# Altium PCB 5V2A Flyback converter pcb.PcbDoc
Units mm, origin at the board's own origin, x right, y up, seen from the top; angles counter-clockwise.
Board outline 103 x 38.2 mm, 2 copper layers (Top Layer, Bottom Layer), stack 1.571 mm thick; 36 components, 22 nets, 102 pads, 22 vias.
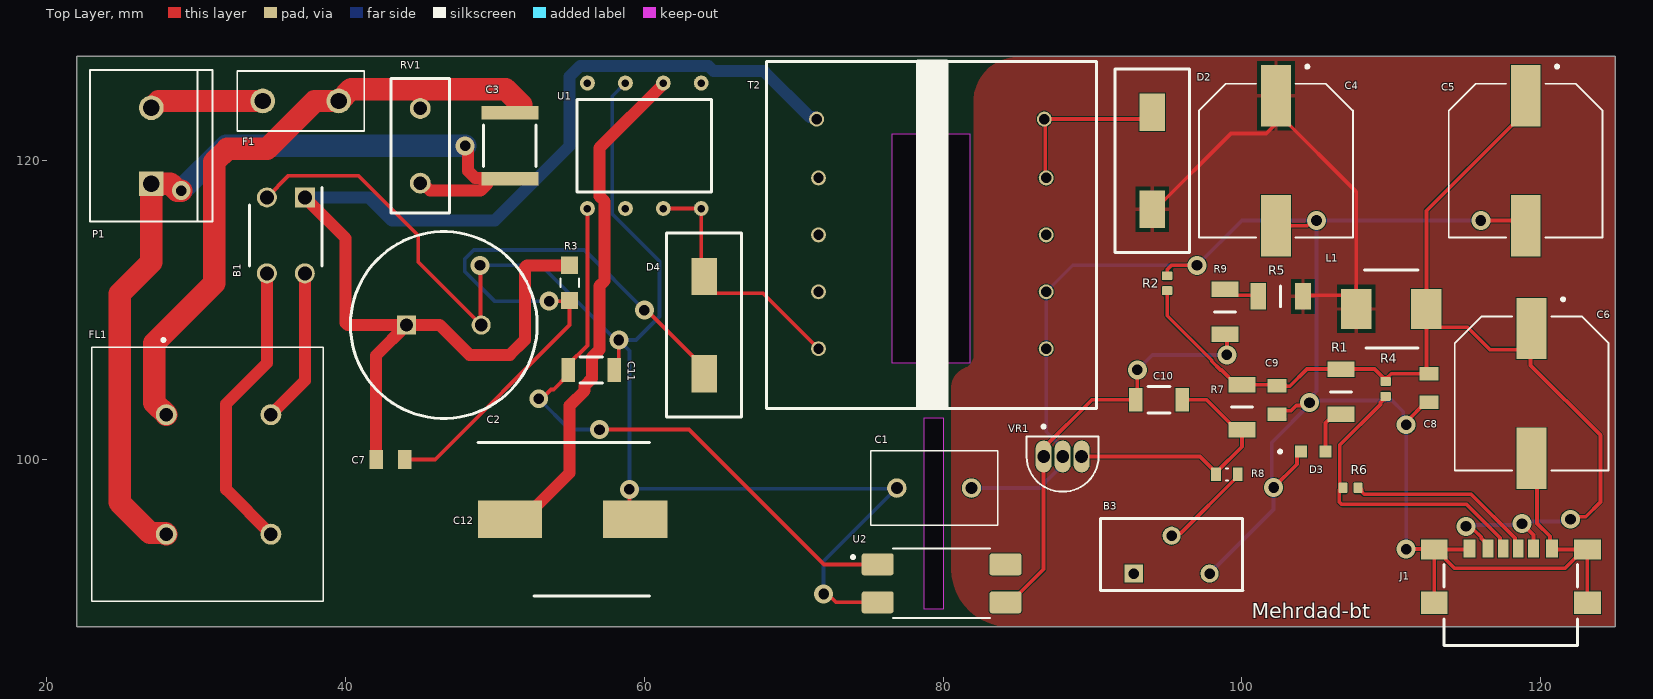
[diagram p0: Top Layer view]
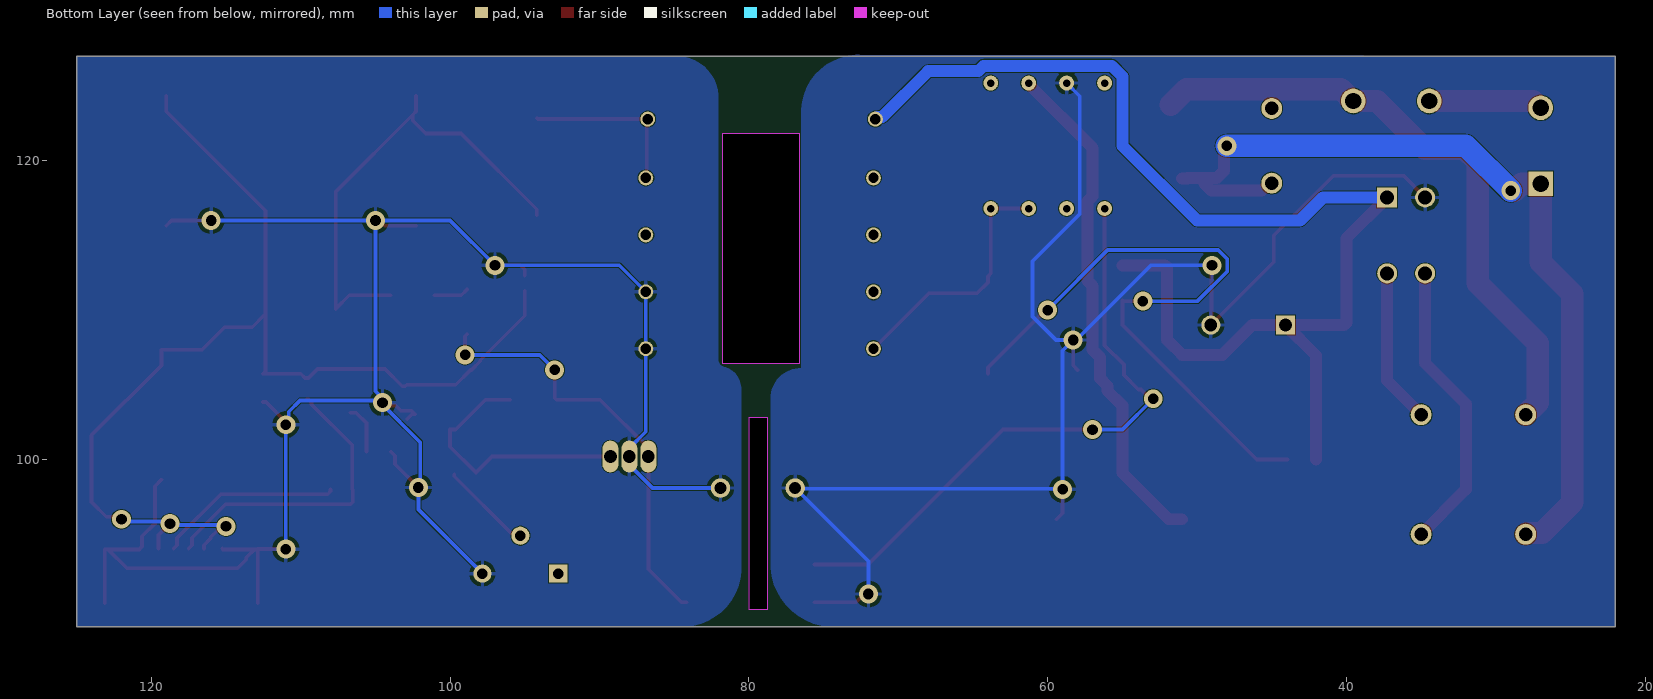
[diagram p1: Bottom Layer view, seen from below]
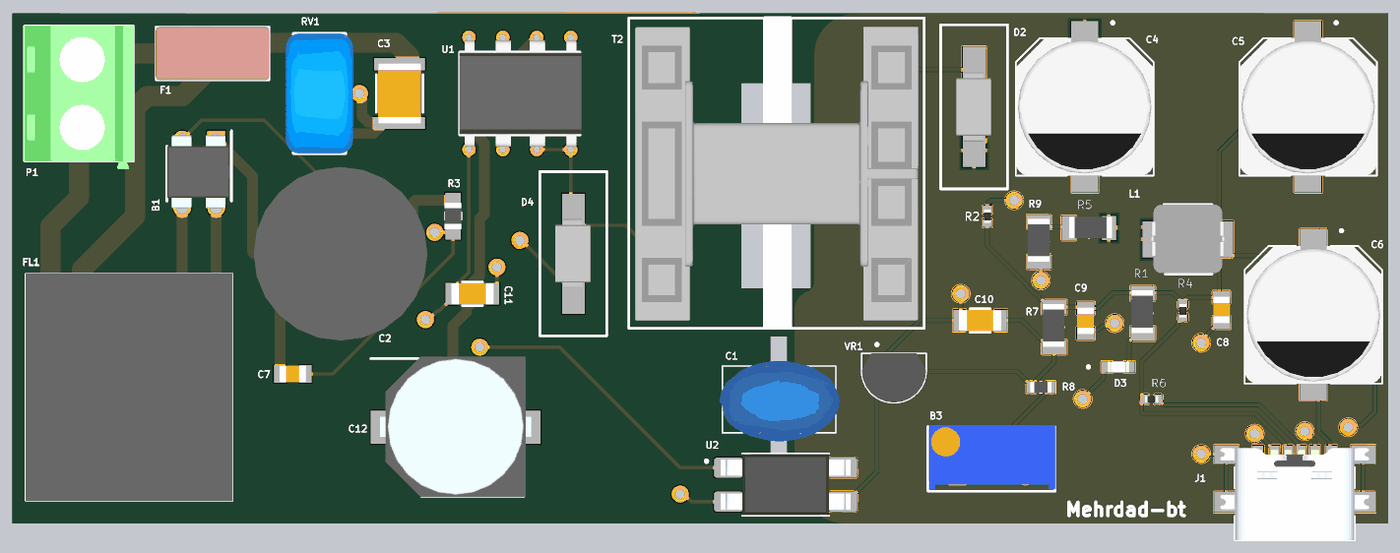
[diagram p2: 3D render of the assembled board from above, using the file's embedded part models]

## Layer stack, top to bottom
Top Solder: solder mask 0.0102, Solder Resist, Dk 3.5
Top Layer: signal copper 0.0356
Dielectric 1: dielectric 1.5, FR-4, Dk 4.8
Bottom Layer: signal copper 0.0356
Bottom Solder: solder mask 0.0102, Solder Resist, Dk 3.5

## Board outline
22,88.8 22,127 125,127 125,88.8
cut-out: 78.74,89.98 78.74,102.806 80.01,102.806 80.01,89.98
cut-out: 76.581,106.426 76.581,121.793 81.788,121.793 81.788,106.426

## Design rules (kind name [scope] priority, off if disabled: settings)
Clearance [All] p1: gap=0.05 ignorepadtopadclearanceinfootprint=TRUE
Height [All] p1: minheight=0 maxheight=30 prefheight=12.7
PolygonConnect [All] p1: connectstyle=Relief reliefconductorwidth=0.254 reliefentries=4 polygonreliefangle="90 Angle" airgapwidth=0.254
RoutingVias [All] p1: holewidth=0.711 width=1.27 viastyle="Through Hole" minholewidth=0.711 minwidth=1.27 maxholewidth=0.711 maxwidth=1.27
SolderMaskExpansion [All] p1: expansion=0.102 istentingtop=FALSE
Width [All] p1: maxlimit=0.254 minlimit=0.254 preferedwidth=0.254
29 further rules are at their usual default settings.

## Components (designator, comment, footprint, x,y, rotation, side; value= is the part's Value field where it differs from the comment)
B1 "MB6M-E3_45" DIP508W74P254L469H270Q4N 36,115 r270 top
B3 "Potentiometer" 3296Y1504LF 92.76,92.36 r90 top
C1 "2.2nf 1kv" CK45B3AD222KYNNA 76.9,98.088 r0 top
C2 "22uf 400v" CAPPRD500W65D1250H2700 44.079,109 r0 top
C3 "100nF 630v" WCAP-CSMH_1812_L4.5W3.2H2 51,121 r90 top
C4 "1000uf 10v" CAP_EEEFN1A102P 102.279,120 r270 top
C5 "1000uf 10v" CAP_EEEFN1A102P 119,120 r270 top
C6 "1000uf 10v" CAP_EEEFN1A102P 119.4,104.425 r270 top
C7 "10nF 200v" WCAP-CSMH_0805_L2W1.25H1.25 43,100 r180 top
C8 "1uF" WCAP-CSST_0805_L2W1.25H1.25 112.527,104.794 r90 top
C9 "100nF" WCAP-CSST_0805_L2W1.25H1.25 102.35,103.975 r90 top
C10 "100nF" WCAP-CSST_1206_L3.2W1.6H1.25 94.45,104 r0 top
C11 "10nF" WCAP-CSST_1206_L3.2W1.6H1.25 56.45,106 r180 top
C12 "100uf 16v" CAPAE1030X1100N 55.2,96 r0 top
D2 "RS1M-13-F" B360A-13-F 94,120 r270 top value=15pF
D3 "KP-1608SURCK" LED_KP-1608SURCK 104.783,100.524 r0 top
D4 "RS1M-13-F" B360A-13-F 64,109 r270 top value=15pF
F1 "39211000440" "LITTELFUSE 39211000440" 37,124 r0 top
FL1 "7355-H-RC_1" 7355HRC 28,103 r0 top
J1 "USB4135-GF-A_REVA" GCT_USB4135-GF-A_REVA 118,90.4 r0 top
L1 "10uh" INDPM5552X200N 110,110.079 r0 top
P1 "282837-2" TE_282837-2 27,121 r90 top
R1 "1k" 4.7k 106.625,104.532 r90 top
R2 "470R" RES_0402 95,111.8 r270 top
R3 "68k" RES_ERA6ARW683V 55,111.825 r90 top
R4 "10k" RES_0402 109.625,104.725 r270 top
R5 "1k" 4.7k 102.595,110.925 r0 top
R6 "10k" RES_0402 107.275,98.1 r180 top
R7 "4.7k" 4.7k 100,103.5 r90 top
R8 "4.3k" RES_ERJU03F4301V 99,99 r180 top
R9 "4.7k" 4.7k 98.866,109.888 r90 top
RV1 "470v 1200A" MOV-07DXXXK(3.9T) 45,121 r90 top
T2 "B66206B1110T001" "PCBCOMPONENT_1 - DUPLICATE" 79.216,115.1 r0 top
U1 "DK1203" "DK1203 - DUPLICATE" 60,121 r270 top
U2 "PC817X2NIP1B" SOIC254P960X420-4N 79.9,91.708 r0 top
VR1 "TL431CLP" VREG_TL431CLP 88,100.2 r180 top

## Footprints (in the part's own frame and the unit in brackets; to place one, negate y for a bottom-side part, rotate by r counter-clockwise, add the part's x,y. Pads: shape width x height; smd on the part's side, far side on the other; paste and mask are expansions set on the pad)
4.7k [mm]
  rect 1.05x1.8 smd: 1(-1.5,0) 2(1.5,0)
  silkscreen extent 0,-0.7 0,0.7, body extent -1.47,-0.76 1.73,0.84, height 0.52
3296Y1504LF [mm]
  rect 1.217x1.217 hole 0.71: 1(0,0)
  round 1.217 hole 0.71: 2(2.54,-2.54) 3(0,-5.08)
  silkscreen extent -1.14,-7.3 3.69,2.22, body extent -1.02,-7.37 3.82,2.16, height 17.97
7355HRC [mm]
  round 1.4 hole 0.9: 1(0,0) 2(7,0) 3(7,-8) 4(0,-8)
  silkscreen extent -5,-12.5 10.5,5.1, body extent -5,-12.5 10.5,4.5, height 12.1
B360A-13-F [mm]
  rect 2.5x1.7 smd: 1(-3.25,0) 2(3.25,0)
  silkscreen extent -6.15,-2.5 6.15,2.5, body extent -2.6,-1.34 2.6,1.27, height 2.19
CAP_EEEFN1A102P [mm]
  rect 4.1x2 smd: 1(-4.35,0) 2(4.35,0)
  silkscreen extent -6.4,-5.15 5.15,5.15, body extent -5.85,-5.15 5.85,5.15, height 9.3
CAPAE1030X1100N [mm]
  rect 4.3x2.5 smd: 1(-4.2,0) 2(4.2,0)
  silkscreen extent -6.35,-5.15 5.15,5.15, body extent -5.65,-5.21 5.65,5.29, height 11
CAPPRD500W65D1250H2700 [mm]
  rect 1.275x1.275 / inner round 1.275 / far side rect 1.275x1.275 hole 0.85: 1(0,0)
  round 1.275 hole 0.85: 2(5,0)
  silkscreen extent -3.75,-6.25 8.75,6.25, body extent -3.99,-6.5 9,6.5, height 27
CK45B3AD222KYNNA [mm]
  round 1.3 hole 0.8: 1(0,0) 2(5,0)
  silkscreen extent -1.75,-2.5 6.75,2.5, body extent -1.96,-3.13 7.04,2.87, height 4.49
DIP508W74P254L469H270Q4N [mm]
  rect 1.34x1.34 / inner round 1.34 / far side rect 1.34x1.34 hole 0.94: 1(-2.54,1.27)
  round 1.34 hole 0.94: 2(-2.54,-1.27) 3(2.54,-1.27) 4(2.54,1.27)
  silkscreen extent -3.21,-2.41 2.05,2.41, body extent -2.85,-2.4 2.6,2.29, height 2.7
"DK1203 - DUPLICATE" [mm]
  round 1 hole 0.5: 1(-4.2,3.81) 2(-4.2,1.27) 3(-4.2,-1.27) 4(-4.2,-3.81) 5(4.2,-3.81) 6(4.2,-1.27) 7(4.2,1.27) 8(4.2,3.81)
  silkscreen extent -3.1,-4.5 3.1,4.5, body extent -3.97,-4.53 3.97,4.62, height 7.24
GCT_USB4135-GF-A_REVA [mm]
  rect 0.7x1.2 smd: A5(-0.5,3.635) B5(0.5,3.635)
  rect 0.76x1.2 smd: A9(1.52,3.635) B9(-1.52,3.635)
  rect 0.8x1.2 smd: A12(2.75,3.635) B12(-2.75,3.635)
  rect 1.8x1.35 smd: S1(-5.125,3.58) S4(5.125,3.58)
  rect 1.8x1.5 smd: S2(-5.125,0) S3(5.125,0)
  silkscreen extent -4.47,-2.85 4.47,2.59, body extent -5.57,-2.85 5.57,4.05, height 3.25
INDPM5552X200N [mm]
  rect 2.05x2.7 smd: 1(-2.35,0) 2(2.35,0)
  silkscreen extent -1.8,-2.6 1.8,2.6, body extent -2.73,-2.54 2.73,2.61, height 1.93
LED_KP-1608SURCK [mm]
  rect 0.8x0.8 smd: 1(0.825,0) 2(-0.825,0)
  silkscreen extent -2.32,-0.1 -2.12,0.1, body extent -0.8,-0.4 0.8,0.4, height 1.1
"LITTELFUSE 39211000440" [mm]
  round 1.65 hole 1.1: 1(-2.54,0) 2(2.54,0)
  silkscreen extent -4.25,-2 4.25,2, body extent -4.25,-2 4.25,2, height 8
MOV-07DXXXK(3.9T) [mm]
  round 1.4 hole 0.9: 1(-2.5,0) 2(2.5,0)
  silkscreen extent -4.5,-1.95 4.5,1.95, body extent -4.5,-2.5 4.5,2.5, height 4.5
"PCBCOMPONENT_1 - DUPLICATE" [mm]
  round 1 hole 0.7 paste-2539.97 mask+0: 1(-7.683,7.683) 2(-7.556,3.746) 3(-7.556,-0.064) 4(-7.556,-3.873) 5(-7.556,-7.683) 6(7.556,7.683) 7(7.683,3.746) 8(7.683,-0.064) 9(7.683,-3.873) 10(7.683,-7.683)
  silkscreen extent -11.05,-11.68 11.05,11.56, body extent -10.6,-11.11 10.6,10.89, height 19.81
RES_0402 [mm]
  rrect25% 0.6x0.7 smd: 1(-0.5,0) 2(0.5,0)
  body extent -0.5,-0.25 0.5,0.25, height 0.3
RES_ERA6ARW683V [mm]
  rect 1.15x1.15 smd: 1(-1.175,0) 2(1.175,0)
  silkscreen extent -0.28,-0.63 0.28,0.63, body extent -1,-0.63 1,0.63, height 0.6
RES_ERJU03F4301V [mm]
  rect 0.65x0.9 smd: 1(-0.725,0) 2(0.725,0)
  silkscreen extent -0.08,-0.4 0.08,0.4, body extent -0.8,-0.4 0.8,0.4, height 0.45
SOIC254P960X420-4N [mm]
  rrect25% 2.15x1.48 smd: 1(-4.28,1.27) 2(-4.28,-1.27) 3(4.28,-1.27) 4(4.28,1.27)
  silkscreen extent -6.03,-2.33 3.25,2.33, body extent -4.87,-2.29 4.87,2.29, height 4
TE_282837-2 [mm]
  rect 1.65x1.65 / inner round 1.65 / far side rect 1.65x1.65 hole 1.1: 1(-2.54,0)
  round 1.65 hole 1.1: 2(2.54,0)
  silkscreen extent -5.08,-4.1 5.08,4.1, body extent -5.68,-4.1 5.08,4.1, height 10
VREG_TL431CLP [mm]
  oval 1.07x2.14 hole 0.85: 1(1.27,0) 2(0,0) 3(-1.27,0)
  silkscreen extent -2.41,-2.1 2.41,2.35, body extent -2.41,-1.33 2.41,2.35, height 5.34
WCAP-CSMH_0805_L2W1.25H1.25 [mm] "Ceramic Capacitors, body 2x1.25mm"
  rect 0.9x1.3 smd: 1(-0.95,0) 2(0.95,0)
  body extent -1,-0.63 1,0.63, height 1.25
WCAP-CSMH_1812_L4.5W3.2H2 [mm] "Ceramic Capacitors, body 4.5x3.2mm"
  rect 0.9x3.8 smd: 1(-2.2,0) 2(2.2,0)
  silkscreen extent -1.4,-1.75 1.4,1.75, body extent -2.25,-1.6 2.25,1.6, height 2
WCAP-CSST_0805_L2W1.25H1.25 [mm] "Soft Termination MLCC, body 2.00x1.25mm"
  rect 0.9x1.3 smd: 1(-0.95,0) 2(0.95,0)
  body extent -1,-0.63 1,0.63, height 1.25
WCAP-CSST_1206_L3.2W1.6H1.25 [mm] "Soft Termination MLCC, body 3.20x1.60mm"
  rect 0.9x1.6 smd: 1(-1.55,0) 2(1.55,0)
  silkscreen extent -0.75,-0.87 0.75,0.87, body extent -1.6,-0.8 1.6,0.8, height 1.25

## Part data
B1: "Diode Rectifier Bridge Single 600V 0.8A Vishay MB6M-E3/45, Bridge Rectifier, 0.8A 600V, 4-Pin MBM", Arrow Part Number=MB6M-E3/45, Manufacturer_Name=Vishay, Mouser Part Number=625-MB6M-E3, Arrow Price/Stock=https://www.arrow.com/en/products/mb6m-e345/vishay?region=nac, Datasheet Link=http://www.vishay.com/docs/88660/mb2m.pdf, Geometry.Height=2.7mm, Manufacturer_Part_Number=MB6M-E3/45, Mouser Price/Stock=https://www.mouser.co.uk/ProductDetail/Vishay-General-Semiconductor/MB6M-E3-45?qs=NyKJzQ80QAzaNJrfLfHWPg%3D%3D
B3: "Trimmer Resistors - Through Hole 3/8\" 500Kohms Sealed Vertical Adjust", Arrow Part Number=3296Y-1-504LF, Manufacturer_Name=Bourns, Mouser Part Number=652-3296Y-1-504LF, Arrow Price/Stock=https://www.arrow.com/en/products/3296y-1-504lf/bourns?region=nac, Datasheet Link=https://componentsearchengine.com/Datasheets/2/3296Y-1-504LF.pdf, Geometry.Height=10.28mm, Manufacturer_Part_Number=3296Y-1-504LF, Mouser Price/Stock=https://www.mouser.co.uk/ProductDetail/Bourns/3296Y-1-504LF?qs=YcQ0SKcgwSr8aRG8Of3gNA%3D%3D
C1: "Disc Type Capacitors with Lead (High Voltage Ceramic Capacitors), Capacitance=2.2nF, DxT: 8.5x5mm ,F: 5mm", Arrow Part Number=CK45-B3AD222KYNNA, Manufacturer_Name=TDK, Mouser Part Number=810-CK45-B3AD222NNA, Arrow Price/Stock=https://www.arrow.com/en/products/ck45-b3ad222kynna/tdk?utm_currency=USD&region=nac, Datasheet Link=https://product.tdk.com/system/files/dam/doc/product/capacitor/ceramic/lead-disc/catalog/leaddisc_commercial_ck45_en.pdf, Geometry.Height=12.5mm, Manufacturer_Part_Number=CK45-B3AD222KYNNA, Mouser Price/Stock=https://www.mouser.co.uk/ProductDetail/TDK/CK45-B3AD222KYNNA?qs=2FIyTMJ0hNk3eTUvPTIP4A%3D%3D
C2: library part 22uf, "Aluminium Electrolytic Capacitors - Radial Leaded Al Lytic Cap Radial NHG Series 105C", Arrow Part Number=ECA-2GHG220, Manufacturer_Name=Panasonic, Mouser Part Number=667-ECA-2GHG220, Arrow Price/Stock=https://www.arrow.com/en/products/eca-2ghg220/panasonic, Datasheet Link=http://industrial.panasonic.com/cdbs/www-data/pdf/RDF0000/ABA0000C1215.pdf, Geometry.Height=27mm, Manufacturer_Part_Number=ECA-2GHG220, Mouser Price/Stock=https://www.mouser.co.uk/ProductDetail/Panasonic/ECA-2GHG220?qs=ScpEy4ykWJx1iqxOLURymA%3D%3D
C3: library part 885342211006, "WCAP-CSMH Multilayer Ceramic Chip Capacitor, Mid and High Voltage, size 1812, X7R Class II, 100nF, 630VDC", Capacitance=100nF, Capacitance Tolerance=10%, Case/Size Code=1812, Insulation Resistance=1GΩ, Manufacturer="Wurth Elektronik", Operating Temperature Max=125°C, Operating Temperature Min=-55°C, Rated Voltage (DC)=630V, Category="Multilayer Ceramic Chip Capacitors", Ceramic Type="X7R Class II", ComponentLink1Description="Website Link", ComponentLink1URL=https://www.we-online.com/redexpert/article/885342211006?ad, ComponentLink2Description="Datasheet Link", ComponentLink2URL=https://www.we-online.com/redexpert/spec/885342211006?ad, Dissipation Factor=2.5%, Height=2mm, Length=4.5mm, Manufacturer Part Number=885342211006, Match Code=WCAP-CSMH, Mount="Surface Mount", Packaging="Tape and Reel", Technical Reference=X7R1812104K630DFCT10000, Width=3.2mm
C4 C5 C6: library part EEEFN1A102P, "CAP ALUM 1000UF 20% 10V SMD", Package="RADIAL-2 Panasonic", Availability="In Stock", Check_prices=https://www.snapeda.com/parts/EEE-FN1A102P/Panasonic/view-part/6178528/?ref=eda, MF="Panasonic Electronic Components", MP=EEE-FN1A102P, Price=None, Purchase-URL=https://pricing.snapeda.com/search/part/EEE-FN1A102P/?ref=eda, SnapEDA_Link=https://www.snapeda.com/parts/EEE-FN1A102P/Panasonic/view-part/6178528/?ref=snap
C7: library part 885342207005, "WCAP-CSMH Multilayer Ceramic Chip Capacitor, Mid and High Voltage, size 0805, X7R Class II, 10nF, 200VDC", Capacitance=10nF, Capacitance Tolerance=10%, Case/Size Code=0805, Insulation Resistance=10GΩ, Manufacturer="Wurth Elektronik", Operating Temperature Max=125°C, Operating Temperature Min=-55°C, Rated Voltage (DC)=200V, Category="Multilayer Ceramic Chip Capacitors", Ceramic Type="X7R Class II", ComponentLink1Description="Website Link", ComponentLink1URL=https://www.we-online.com/redexpert/article/885342207005?ad, ComponentLink2Description="Datasheet Link", ComponentLink2URL=https://www.we-online.com/redexpert/spec/885342207005?ad, Dissipation Factor=2.5%, Height=1.25mm, Length=2mm, Manufacturer Part Number=885342207005, Match Code=WCAP-CSMH, Mount="Surface Mount", Packaging="Tape and Reel", Technical Reference=X7R0805103K200DFCT10000, Width=1.25mm
C8: library part 885382207001, "WCAP-CSST Multilayer Ceramic Chip Capacitor, Soft Termination, SMT, size 0805, X7R Class II, 1uF, 16V", Capacitance Tolerance=+/-10%, Case/Size Code=0805, Insulation Resistance=0.5GOhm, Manufacturer="Wurth Elektronik", Operating Temperature Max=125°C, Operating Temperature Min=-55°C, Rated Voltage (DC)=16V, Capacitance=1uF, Category="Multilayer Ceramic Chip Capacitors", Ceramic Type="X7R Class II", ComponentLink1Description="Website Link", ComponentLink1URL=https://www.we-online.com/redexpert/article/885382207001?ad, ComponentLink2Description="Datasheet Link", ComponentLink2URL=https://www.we-online.com/redexpert/spec/885382207001?ad, Dissipation Factor=5%, Height=1.25mm, Length=2mm, Manufacturer Part Number=885382207001, Match Code=WCAP-CSST, Mount="Surface Mount", Packaging="Tape and Reel", Technical Reference=X7R0805105K016DFCT1S000, Width=1.25mm
C9: library part 885382207007, "WCAP-CSST Multilayer Ceramic Chip Capacitor, Soft Termination, SMT, size 0805, X7R Class II, 100nF, 50V", Capacitance Tolerance=+/-10%, Case/Size Code=0805, Insulation Resistance=5GOhm, Manufacturer="Wurth Elektronik", Operating Temperature Max=125°C, Operating Temperature Min=-55°C, Rated Voltage (DC)=50V, Capacitance=100nF, Category="Multilayer Ceramic Chip Capacitors", Ceramic Type="X7R Class II", ComponentLink1Description="Website Link", ComponentLink1URL=https://www.we-online.com/redexpert/article/885382207007?ad, ComponentLink2Description="Datasheet Link", ComponentLink2URL=https://www.we-online.com/redexpert/spec/885382207007?ad, Dissipation Factor=2.5%, Height=1.25mm, Length=2mm, Manufacturer Part Number=885382207007, Match Code=WCAP-CSST, Mount="Surface Mount", Packaging="Tape and Reel", Technical Reference=X7R0805104K050DFCT1S000, Width=1.25mm
C10: library part 885382208006, "WCAP-CSST Multilayer Ceramic Chip Capacitor, Soft Termination, SMT, size 1206, X7R Class II, 100nF, 100V", Capacitance Tolerance=+/-10%, Case/Size Code=1206, Insulation Resistance=1GOhm, Manufacturer="Wurth Elektronik", Operating Temperature Max=125°C, Operating Temperature Min=-55°C, Rated Voltage (DC)=100V, Capacitance=100nF, Category="Multilayer Ceramic Chip Capacitors", Ceramic Type="X7R Class II", ComponentLink1Description="Website Link", ComponentLink1URL=https://www.we-online.com/redexpert/article/885382208006?ad, ComponentLink2Description="Datasheet Link", ComponentLink2URL=https://www.we-online.com/redexpert/spec/885382208006?ad, Dissipation Factor=2.5%, Height=1.25mm, Length=3.2mm, Manufacturer Part Number=885382208006, Match Code=WCAP-CSST, Mount="Surface Mount", Packaging="Tape and Reel", Technical Reference=X7R1206104K100DFCT1S000, Width=1.6mm
C11: library part 885382208002, "WCAP-CSST Multilayer Ceramic Chip Capacitor, Soft Termination, SMT, size 1206, X7R Class II, 10nF, 50V", Capacitance Tolerance=+/-10%, Case/Size Code=1206, Insulation Resistance=10GOhm, Manufacturer="Wurth Elektronik", Operating Temperature Max=125°C, Operating Temperature Min=-55°C, Rated Voltage (DC)=50V, Capacitance=10nF, Category="Multilayer Ceramic Chip Capacitors", Ceramic Type="X7R Class II", ComponentLink1Description="Website Link", ComponentLink1URL=https://www.we-online.com/redexpert/article/885382208002?ad, ComponentLink2Description="Datasheet Link", ComponentLink2URL=https://www.we-online.com/redexpert/spec/885382208002?ad, Dissipation Factor=2.5%, Height=1.25mm, Length=3.2mm, Manufacturer Part Number=885382208002, Match Code=WCAP-CSST, Mount="Surface Mount", Packaging="Tape and Reel", Technical Reference=X7R1206103K050DFCT1S000, Width=1.6mm
C12: library part 100uf16v, "Nichicon 100uF 16 V dc Polymer Aluminium Electrolytic Capacitor, PS Series 2000h 10 Dia. x 7.7mm", Arrow Part Number=RPS1C101MCN1GS, Manufacturer_Name=Nichicon, Mouser Part Number=647-RPS1C101MCN1GS, Arrow Price/Stock=https://www.arrow.com/en/products/rps1c101mcn1gs/nichicon?region=nac, Datasheet Link=https://www.arrow.com/en/products/rps1c101mcn1gs/nichicon?region=nac, Geometry.Height=11mm, Manufacturer_Part_Number=RPS1C101MCN1GS, Mouser Price/Stock=https://www.mouser.co.uk/ProductDetail/Nichicon/RPS1C101MCN1GS?qs=eL6fcoQH66MLvHfa%252BDZQ0A%3D%3D
D2 D4: "Rectifier Diode Switching 1KV 1A 500ns 2-Pin SMA T/R / DIODE GEN PURP 1KV 1A SMA", Average Rectified Current=1A, Case/Package=SMA, Forward Voltage=1.3V, Manufacturer=Diodes, Max Forward Surge Current (Ifsm)=30A, Max Operating Temperature=150°C, Max Repetitive Reverse Voltage (Vrrm)=1kV, Max Reverse Current=5uA, Min Operating Temperature=-65°C, Package Quantity=5000, Supplier Part Number=9545039, Category="Rectifier Diodes", ComponentLink1Description=https://datasheet.ciiva.com/22695/1911854-22695829.pdf?src-supplier=Element14, ComponentLink1URL=https://datasheet.ciiva.com/22695/1911854-22695829.pdf?src-supplier=Element14, ComponentLink2Description=https://datasheet.ciiva.com/8301/ds15002-8301719.pdf?src-supplier=Avnet, ComponentLink2URL=https://datasheet.ciiva.com/8301/ds15002-8301719.pdf?src-supplier=Avnet, ComponentLink3Description=https://datasheet.ciiva.com/15144/getdatasheetpartid-102368-15144828.pdf?src-supplier=Verical, ComponentLink3URL=https://datasheet.ciiva.com/15144/getdatasheetpartid-102368-15144828.pdf?src-supplier=Verical, Current=1A, Current Rating=1A, Forward Current=1A, Height=2.1mm, Lead Free="Lead Free", Length=4.6mm, Manufacturer Part Number=RS1M-13-F, Max Reverse Voltage (DC)=1kV, Max Surge Current=30A, Mounting Technology="Surface Mount", Output Current=1A, Packaging="Tape and Reel", Peak Non-Repetitive Surge Current=30A, Pins=2, Polarity=Standard, Pricing="5000=0.0396, 10000=0.0389, 15000=0.0385, 20000=0.0383, 25000=0.0374 (USD)", Radiation Hardening=No, Reach SVHC Compliant=No, Recovery Time=500ns, Reverse Recovery Time=500ns, Reverse Recovery Time-Max=500ns, Reverse Voltage=1kV, Reverse Voltage (DC)=1kV, RoHS=Yes, RoHS Compliant=Yes, Series=-, Stock=400000, Supplier="Future Electronics", Voltage=1kV, Voltage Rating (DC)=1kV, Weight=0.002258oz, Width=2.92mm
D3: "LED; SMD; 0603; red; 50-150mcd; 1.6x0.8mm; 120Â°; 20mA;", Package="0603 Kingbright", Check_prices=https://www.snapeda.com/parts/KP-1608SURCK/Kingbright/view-part/?ref=eda, MF=Kingbright, MP=KP-1608SURCK, SnapEDA_Link=https://www.snapeda.com/parts/KP-1608SURCK/Kingbright/view-part/?ref=snap
F1: "Fuse Subminiature Slow Blow Acting 1.1A 250V Radial 8.5 X 4 X 8mm Thermoplastic Bulk", Manufacturer="Littelfuse Wickmann", Supplier Part Number=F4534-ND, Category=Fuses, ComponentLink1Description=https://datasheet.ciiva.com/7463/ltitelfuse-fuse-392-7463242.pdf?src-supplier=Digikey, ComponentLink1URL=https://datasheet.ciiva.com/7463/ltitelfuse-fuse-392-7463242.pdf?src-supplier=Digikey, ComponentLink2Description=https://datasheet.ciiva.com/8078/ltitelfuse-fuse-392-8078439.pdf?src-supplier=Element14, ComponentLink2URL=https://datasheet.ciiva.com/8078/ltitelfuse-fuse-392-8078439.pdf?src-supplier=Element14, ComponentLink3Description=https://datasheet.ciiva.com/4483/ltitelfuse-fuse-392-42681-4483166.pdf?src-supplier=Mouser, ComponentLink3URL=https://datasheet.ciiva.com/4483/ltitelfuse-fuse-392-42681-4483166.pdf?src-supplier=Mouser, Manufacturer Part Number=39211000440, Pricing="1=0.43, 5=0.36, 10=0.331, 50=0.2748, 100=0.2535, 250=0.22792, 500=0.21026, 1400=0.18639, 5600=0.15824 (USD)", RoHS=Yes, Stock=1396, Supplier=Digikey
FL1: "Filter", Manufacturer_Name=Bourns, Manufacturer_Part_Number=7355-H-RC, Datasheet Link=https://www.bourns.com/docs/Product-Datasheets/7300_series.pdf, Height=12mm
J1: "USB CONN, TYPE C, R/A RCPT, 6POS, SMT; USB Connector Type:USB Type C; USB Standard:-; Gender:Receptacle; No. of Positions:6Positions; Connector Mounting:Surface Mount; Orientation:Right Angle; Contact 26AK7776", Package=None, Check_prices=https://www.snapeda.com/parts/USB4135GFA/Global+Connector+Technology/view-part/?ref=eda, MF="Global Connector Technology", MP=USB4135GFA, SnapEDA_Link=https://www.snapeda.com/parts/USB4135GFA/Global+Connector+Technology/view-part/?ref=snap
L1: "Vishay IHLP2020BZ-01 Series Shielded Wire-wound SMD Inductor 10 uH +/-20% 4A Idc", Arrow Part Number=IHLP2020BZER100M01, Manufacturer_Name=Vishay, Mouser Part Number=70-IHLP2020BZER100M0, Arrow Price/Stock=https://www.arrow.com/en/products/ihlp2020bzer100m01/vishay?region=europe, Datasheet Link=https://datasheet.datasheetarchive.com/originals/distributors/Datasheets-DGA11/2193762.pdf, Geometry.Height=2mm, Manufacturer_Part_Number=IHLP2020BZER100M01, Mouser Price/Stock=https://www.mouser.co.uk/ProductDetail/Vishay-Dale/IHLP2020BZER100M01?qs=ZAjGDd5n2aH5Lxf04Dpbtg%3D%3D
P1: "Ð Ð°Ð·ÑŠÐµÐ¼Ð½Ñ‹Ðµ ÐºÐ»ÐµÐ¼Ð¼Ð½Ñ‹Ðµ ÐºÐ¾Ð»Ð¾Ð´ÐºÐ¸ Ð Ð¾Ð·ÐµÑ‚ÐºÐ° 2 Ð¿Ð¾Ð»Ð¾Ð¶ÐµÐ½Ð¸Ñ 5,08 Ð¼Ð¼ ÐŸÑ€Ð¸Ð¿Ð¾Ð¹ Ð¿Ñ€ÑÐ¼Ð¾Ð¹ Ñ‡ÐµÑ€ÐµÐ· Ð¾Ñ‚Ð²ÐµÑ€ÑÑ‚Ð¸Ðµ 13,5 Ð / ÐºÐ¾Ð½Ñ‚Ð°ÐºÑ‚", Package=None, Availability="In Stock", Check_prices=https://www.snapeda.com/parts/282837-2/TE+Connectivity+AMP+Connectors/view-part/?ref=eda, MF="TE Connectivity", MP=282837-2, Price=None, Purchase-URL=https://pricing.snapeda.com/search/part/282837-2/?ref=eda, SnapEDA_Link=https://www.snapeda.com/parts/282837-2/TE+Connectivity+AMP+Connectors/view-part/?ref=snap
R1 R5: library part 4.7k, "CRCW1206 Resistor T/R 0.25W,1%,4K7 Vishay CRCW Series Thick Film Surface Mount Resistor 1206 Case 4.7k", Arrow Part Number=CRCW12064K70FKEA, Manufacturer_Name=Vishay, Mouser Part Number=71-CRCW1206-4.7K-E3, Arrow Price/Stock=https://www.arrow.com/en/products/crcw12064k70fkea/vishay, Datasheet Link=https://datasheet.datasheetarchive.com/originals/distributors/DKDS-23/452928.pdf, Geometry.Height=0.6mm, Manufacturer_Part_Number=CRCW12064K70FKEA, Mouser Price/Stock=https://www.mouser.co.uk/ProductDetail/Vishay-Dale/CRCW12064K70FKEA?qs=1vm4qhDHCvlKJmatsKzyFQ%3D%3D
R2 R4 R6: library part RES_0402, "Resistor SMD 0402"
R3: library part ERA6ARW683V, "RES 68K OHM 0.05% 1/8W 0805", Package="2012-2 Panasonic", Check_prices=https://www.snapeda.com/parts/ERA6ARW683V/Panasonic/view-part/?ref=eda, MF=Panasonic, MP=ERA6ARW683V, SnapEDA_Link=https://www.snapeda.com/parts/ERA6ARW683V/Panasonic/view-part/?ref=snap
R7 R9: "CRCW1206 Resistor T/R 0.25W,1%,4K7 Vishay CRCW Series Thick Film Surface Mount Resistor 1206 Case 4.7k", Arrow Part Number=CRCW12064K70FKEA, Manufacturer_Name=Vishay, Mouser Part Number=71-CRCW1206-4.7K-E3, Arrow Price/Stock=https://www.arrow.com/en/products/crcw12064k70fkea/vishay, Datasheet Link=https://datasheet.datasheetarchive.com/originals/distributors/DKDS-23/452928.pdf, Geometry.Height=0.6mm, Manufacturer_Part_Number=CRCW12064K70FKEA, Mouser Price/Stock=https://www.mouser.co.uk/ProductDetail/Vishay-Dale/CRCW12064K70FKEA?qs=1vm4qhDHCvlKJmatsKzyFQ%3D%3D
R8: library part ERJU03F4301V, "RES 4.3K OHM 1% 1/10W 0603 SMD", Package="1608-2 Panasonic", Check_prices=https://www.snapeda.com/parts/ERJ-U03F4301V/Panasonic/view-part/?ref=eda, MF=Panasonic, MP=ERJ-U03F4301V, SnapEDA_Link=https://www.snapeda.com/parts/ERJ-U03F4301V/Panasonic/view-part/?ref=snap
RV1: library part MOV-07D470K, "47 V 250 A Varistor 1 Circuit Through Hole Disc 7mm", Package="Disc-7 Bourns", Availability="In Stock", Check_prices=https://www.snapeda.com/parts/MOV-07D470K/Bourns/view-part/?ref=eda, MF=Bourns, MP=MOV-07D470K, Price=None, Purchase-URL=https://pricing.snapeda.com/search/part/MOV-07D470K/?ref=eda, SnapEDA_Link=https://www.snapeda.com/parts/MOV-07D470K/Bourns/view-part/?ref=snap
T2: "Ferrite Accessories, Planar Cores Accessories(E/ELP), Coil former (E 20/10/6)", Manufacturer="TDK EPCOS", Supplier Part Number=495-5365-ND, Category="EMI / RFI Components", ComponentLink1Description=https://datasheet.ciiva.com/1375/1756165-1375209.pdf?src-supplier=Element14, ComponentLink1URL=https://datasheet.ciiva.com/1375/1756165-1375209.pdf?src-supplier=Element14, ComponentLink2Description=https://datasheet.ciiva.com/18504/e-20-10-6-18504329.pdf?src-supplier=Digikey, ComponentLink2URL=https://datasheet.ciiva.com/18504/e-20-10-6-18504329.pdf?src-supplier=Digikey, Lead Diameter=450um, Lead Pitch=3.81mm, Manufacturer Part Number=B66206B1110T001, Packaging=14Packaging, Pricing="1=1.95, 10=1.341, 25=1.1464, 50=1.0128, 100=0.8897, 250=0.78212 (USD)", RoHS=Yes, Stock=1221, Supplier=Digikey, Termination=4753ConnectorType
U1: Manufacturer="ON Semiconductor", Manufacturer Part Number=NCP1203GEVB, Output Current=4A, Output Voltage=19V, Package Quantity=1, Supplier Part Number=73R4611, Switching Frequency=60kHz, Category="Embedded Processors and Controllers", ComponentLink1Description=https://datasheet.ciiva.com/2395/ncp1200-d-2395097.pdf?src-supplier=Digikey, ComponentLink1URL=https://datasheet.ciiva.com/2395/ncp1200-d-2395097.pdf?src-supplier=Digikey, Evaluation Kit=Yes, RoHS=Yes, Supplier=Newark
U2: "Optocoupler DC-IN 1-CH Transistor DC-OUT 4-Pin DIP SMD T/R", Package="SMD-4 Sharp Microelectronics", Check_prices=https://www.snapeda.com/parts/PC817X2NIP1B/Sharp+Microelectronics/view-part/?ref=eda, MF="Sharp Microelectronics", MP=PC817X2NIP1B, SnapEDA_Link=https://www.snapeda.com/parts/PC817X2NIP1B/Sharp+Microelectronics/view-part/?ref=snap
VR1: "Adjustable precision shunt regulator", Package="TO-92 Texas Instruments", Check_prices=https://www.snapeda.com/parts/TL431CLP/Texas+Instruments/view-part/?ref=eda, MF="Texas Instruments", MP=TL431CLP, SnapEDA_Link=https://www.snapeda.com/parts/TL431CLP/Texas+Instruments/view-part/?ref=snap

## Via types
v1: diameter 1.27, hole 0.711, Top Layer to Bottom Layer, 22 vias

## Nets (pads, with @x,y where several pads share a name; then routed paths per layer and width w, separated by ;. In a path a pad name is that pad's centre, name@x,y a point inside that pad or via, vN(x,y) a via of type N, cw(c..) or ccw(c..) an arc to the next point about the centre after c; other vN are vias at no path point)
"+5 v1": C4.1 D2.2 L1.1 R5.2 | length 32.1
  Top Layer w0.254: D2.2@94.2,116.35 94.2,116.75 99.277,121.827 101.627,121.827 102.5,122.7 C4.1@102.5,123.079 ; C4.1 102.279,123.3 C4.1@102.5,123.079 ; R5.2@104,111 106.752,111 L1.1@107.65,110.102 ; L1.1 L1.1@107.65,110.102 ; C4.1@102.5,123.079 107.65,117.929 L1.1@107.65,110.102
"+5 v2": C5.1 C6.1 C8.2 C9.2 J1.A9 J1.B9 L1.2 R1.2 R2.2 R4.1 R7.2 | length 77.5
  Top Layer w0.254: R2.2 95,109.625 97.984,106.641 97.984,106.579 98.579,105.984 98.641,105.984 99.625,105 R7.2 102.9,105 103,104.9 103.2,104.9 104.367,106.067 108.869,106.067 109.474,105.462 109.724,105.462 110.005,105.744 C8.2 112.35,105.921 L1.2@112.35,109.754 ; v1(115,95.524) 115.194,95.33 115.494,95.33 116.031,94.793 116.031,94.704 116.48,94.255 J1.B9 ; v1(118.75,95.711) 119.52,94.941 J1.A9 ; C5.1 119,123.3 112.35,116.65 L1.2 L1.2@112.35,109.754 ; v1(122,96) 122.165,96.165 123.016,96.165 124,97.149 124,101.629 119.329,106.3 119.329,107.35 116.605,107.35 115.099,108.856 113.248,108.856 L1.2@112.35,109.754
  Bottom Layer w0.254: v1(115,95.524) 115.094,95.617 118.656,95.617 v1(118.75,95.711) 118.894,95.856 121.855,95.856 v1(122,96)
"DC Line": B1.1 C2.1 C7.2 R3.2 T2.1 | length 84
  Top Layer w0.8: B1.1 40,114.81 40,109.149 40.149,109 C2.1 ; C7.2 42.05,106.971 C2.1 ; R3.2 52.149,113 52,112.851 52,108 51,107 48.295,107 46.295,109 C2.1
  Bottom Layer w0.8: B1.1 41.57,117.54 43.11,116 50,116 55,121 55,125.642 55.712,126.354 64.288,126.354 64.642,126 68,126 71.074,122.926 71.39,122.926 T2.1
GND: B1.2 C1.1 C2.2 C11.1 C12.2 U1.3 U2.2 | length 101.8
  Top Layer w0.254: B1.2 36.19,119 40.851,119 44.868,114.984 44.868,113.212 C2.2 49.04,109.04 49.04,112.96 v1(49,113) ; C11.1 58.289,106.289 v1(58.289,108) ; v1(59,98) 59,96.4 C12.2 ; v1(72,91) 72.275,91 72.836,90.438 U2.2
  Bottom Layer w0.254: v1(49,113) 53.087,113 58.087,108 59.437,108 61.016,109.579 61.016,113.268 57.849,116.435 57.849,124.319 U1.3 ; v1@58.044,107.956 58.318,107.956 59,107.274 v1(59,98) 59.044,98.044 C1.1@76.856,98.044 ; v1(72,91) 72,93.188 C1.1@76.856,98.044 ; C1.1 C1.1@76.856,98.044
GND-2: B3.3 C1.2 C4.2 C5.2 C6.2 C8.1 C9.1 D3.2 J1.A12 J1.B12 J1.S1 J1.S2 J1.S3 J1.S4 R2.1 T2.9 T2.10 VR1.2 | length 140
  Top Layer w0.254: VR1.2 VR1.2@88,100.76 ; R2.1 95,112.721 95.279,113 v1(97,113) ; v1(102.125,98.125) 103.685,99.685 103.685,100.251 D3.2 ; C4.2 104.375,115.65 104.725,116 v1(105,116) ; C9.1@102.873,102.702 102.55,103.025 C9.1 102.585,103.26 103.291,103.26 103.636,103.606 104.331,103.606 v1(104.525,103.8) ; v1(111,94) 112.855,94 J1.S1 ; v1(111,102.325) 111,102.517 112.327,103.844 C8.1 ; J1.S2 J1.S1 ; J1.B12 115.195,93.98 J1.S1@113.1,93.98 ; v1(116,116) 118.65,116 C5.2 ; C6.2@119.329,98.65 119.766,98.214 119.766,95.725 120.623,94.867 120.623,94.162 J1.A12 120.805,93.98 J1.S4@122.9,93.98 ; J1.S3 J1.S4 J1.S4@122.9,93.98 ; J1.S1 J1.S1@113.1,93.98 ; J1.S1@113.1,93.98 113.648,93.432 113.648,93.31 114.241,92.717 121.637,92.717 J1.S4@122.9,93.98
  Bottom Layer w0.254: C1.2 86.448,98.088 88,99.64 VR1.2 88,100.76 86.9,101.86 T2.10 T2.9 88.673,113 v1(97,113) 100,116 v1(105,116) ; B3.3 102.125,96.645 v1(102.125,98.125) 102,98.25 102,101.147 104.659,103.807 v1@104.659,103.954 ; v1(111,94) v1(111,102.325) 110.806,102.519 110.806,103.194 110.046,103.954 v1@104.659,103.954 ; v1(116,116) v1(105,116) ; v1@104.659,103.954 104.659,104.228 105,104.569 v1(105,116)
NetB1_3: B1.3 FL1.3 | length 19.8
  Top Layer w0.8: B1.3 34.73,106.448 32,103.718 32,98 FL1.3
NetB1_4: B1.4 FL1.2 | length 10.4
  Top Layer w0.8: FL1.2 37.27,105.27 B1.4
NetB3_2: B3.2 R8.1 | length 6.2
  Top Layer w0.254: B3.2 95.484,95.084 95.934,95.084 99.725,98.875 R8.1
NetC3_1: C3.1 FL1.4 P1.1 RV1.1 | length 58.7
  Top Layer w0.254: v1(48,121) v1@48.154,120.846
  Top Layer w0.8: RV1.1 45.162,118.5 45.662,118 49.031,118 49.5,118.469 C3.1@49.5,118.75 ; v1@48.154,120.846 48.09,120.783 48.194,120.678 48.194,119.319 48.663,118.85 50.6,118.85 C3.1@50.65,118.85 ; C3.1@50.6,118.8 C3.1
  Top Layer w1.5: FL1.4 27.919,95.081 26.919,95.081 24.875,97.125 24.875,111.083 27,113.208 P1.1 28.265,118.46 28.725,118 v1(29,118)
  Bottom Layer w1.5: v1(29,118) 32,121 v1(48,121)
NetC3_2: C3.2 F1.2 FL1.1 RV1.2 | length 43.2
  Top Layer w1: RV1.2 45,124.792
  Top Layer w1.5: FL1.1 27.202,103.798 27.202,107.792 31.202,111.792 31.202,119.914 32.081,120.792 34.742,120.792 37.95,124 39.581,124 40.373,124.792 45,124.792 50.708,124.792 51.75,123.75
NetC7_1: C7.1 D4.2 R3.1 | length 45
  Top Layer w0.254: C7.1 46,100 55,109 R3.1 54.949,110.599 v1(53.632,110.599) ; v1(60,110) 60.15,110 64,106.15 D4.2
  Bottom Layer w0.254: v1(53.632,110.599) 49.964,110.599 47.984,112.579 47.984,113.421 48.579,114.016 55.984,114.016 v1(60,110)
NetC10_1: C10.1 R9.1 U2.3 VR1.1 | length 29
  Top Layer w0.254: U2.3 84.515,90.438 86.73,92.653 VR1.1 86.73,100.76 89.97,104 C10.1 93,104.1 v1(93,106) ; R9.1 99,108.254 v1(99,107)
  Bottom Layer w0.254: v1(93,106) 94,107 v1(99,107)
NetC10_2: C10.2 R7.1 R8.2 VR1.3 | length 17.9
  Top Layer w0.254: VR1.3 97.2,100.2 98.275,99.125 100,100.85 R7.1 99.625,102 97.625,104 C10.2
NetC11_2: C11.2 U1.5 U2.1 | length 41.6
  Top Layer w0.254: v1(52.933,104.067) 53.137,104.067 53.754,104.683 53.933,104.683 54.9,105.65 C11.2 54.9,106.35 56.19,107.64 U1.5 ; v1(57,102) 63,102 72.022,92.978 U2.1
  Bottom Layer w0.254: v1(52.933,104.067) 55,102 v1(57,102)
NetC12_1: C12.1 U1.2 | length 34.3
  Top Layer w0.8: C12.1 51.9,96 55,99.1 55,103.614 56,104.614 56,104.925 56.5,105.425 56.5,106.845 57,107.345 57,111.623 57.344,111.967 57.344,117.278 57,117.622 57,120.858 61.27,125.128 U1.2
NetD2_1: D2.1 T2.6 T2.7 | length 11.4
  Top Layer w0.254: T2.7 86.836,118.91 86.836,122.72 T2.6 94.134,122.784 D2.1@94.2,122.85
NetD3_1: D3.1 R1.1 | length 3.3
  Top Layer w0.254: D3.1 105.608,102.437 106.298,103.127 R1.1@106.668,103.127
NetD4_1: D4.1 T2.5 U1.7 U1.8 | length 17.1
  Top Layer w0.254: U1.7 U1.8 63.81,112.44 D4.1 64,111.85 64.723,111.127 67.95,111.127 T2.5
NetF1_1: F1.1 P1.2 | length 7.7
  Top Layer w1.5: P1.2 27.041,123.54 27.501,124 F1.1
NetJ1_A5: J1.A5 R4.2 R6.2 | length 20.8
  Top Layer w0.254: R4.2@109.599,104.012 109.474,104.012 109.276,103.814 109.276,103.689 106.55,100.963 106.55,98 106.523,97.973 106.523,97.149 106.672,97 115.034,97 117.277,94.757 117.277,94.258 J1.A5
NetJ1_B5: J1.B5 R6.1 | length 12.5
  Top Layer w0.254: R6.1@108,98 108,97.875 108.198,97.677 115.347,97.677 118.277,94.747 118.277,94.258 J1.B5
NetR5_1: R5.1 R9.2 | length 2.4
  Top Layer w0.254: R9.2 99.254,111 R5.1@101.06,111
pads on no net: B3.1 T2.2 T2.3 T2.4 T2.8 U1.1 U1.4 U1.6 U2.4

## Polygon pours and split planes (outlines as drawn)
GND-2 on Bottom Layer "GND-2_L02_P008" (solid, remove dead copper, pour order 8): 125,127 84.85,127 ccw(c84.849,124.201) 82.05,124.2 82.05,106.694 cw(c81.542,106.694) 81.669,106.202 ccw(c82.05,104.725) 80.525,104.725 80.525,92.75 ccw(c84.475,92.75) 84.475,88.8 125,88.8
GND on Bottom Layer "GND_L02_P001" (solid, remove dead copper, pour order 1): 22,127 22,88.8 74.325,88.8 ccw(c74.325,93.013) 78.538,93.013 78.538,104.087 ccw(c76.511,104.087) 76.511,106.114 76.511,123.194 ccw(c72.605,123.194) 72.598,127.099
"+5 v1" on Top Layer "+5_V1_L01_P002" (solid, remove dead copper, pour order 2): 125,127 125,88.8 84.425,88.8 cw(c84.471,92.719) 80.558,92.926 80.558,104.769 cw(c82.045,104.769) 81.526,106.163 ccw(c81.245,106.917) 82.05,106.917 82.05,123.951 cw(c85.05,123.951) 85.052,126.951

## Silkscreen, mask and mechanical layers (free items; w line width, h text height)
Top Overlay:
  text "Mehrdad-bt" at 100.675,89.375 h1
Mechanical 1:
  lines w0.254: 76.581,106.426 81.788,106.426 81.788,121.793 76.581,121.793 76.581,106.426 ; 78.74,90.17 80.01,90.17 80.01,102.997 78.74,102.997 78.74,90.17